# EAGLE board PCB_Layout (EAGLE 9.7.0)
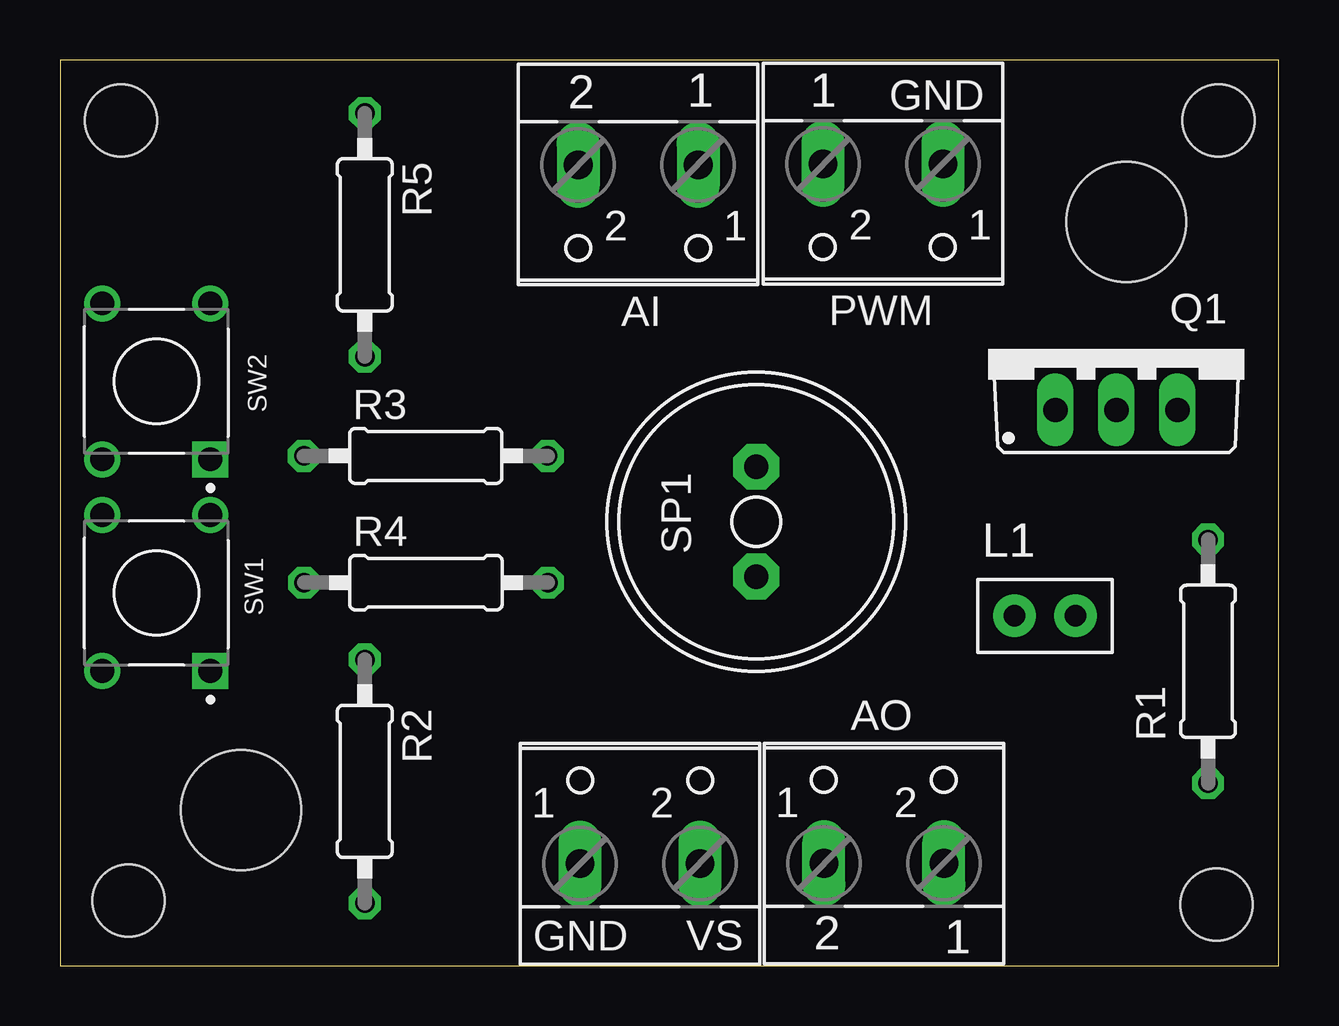
[diagram p0: board, top side]
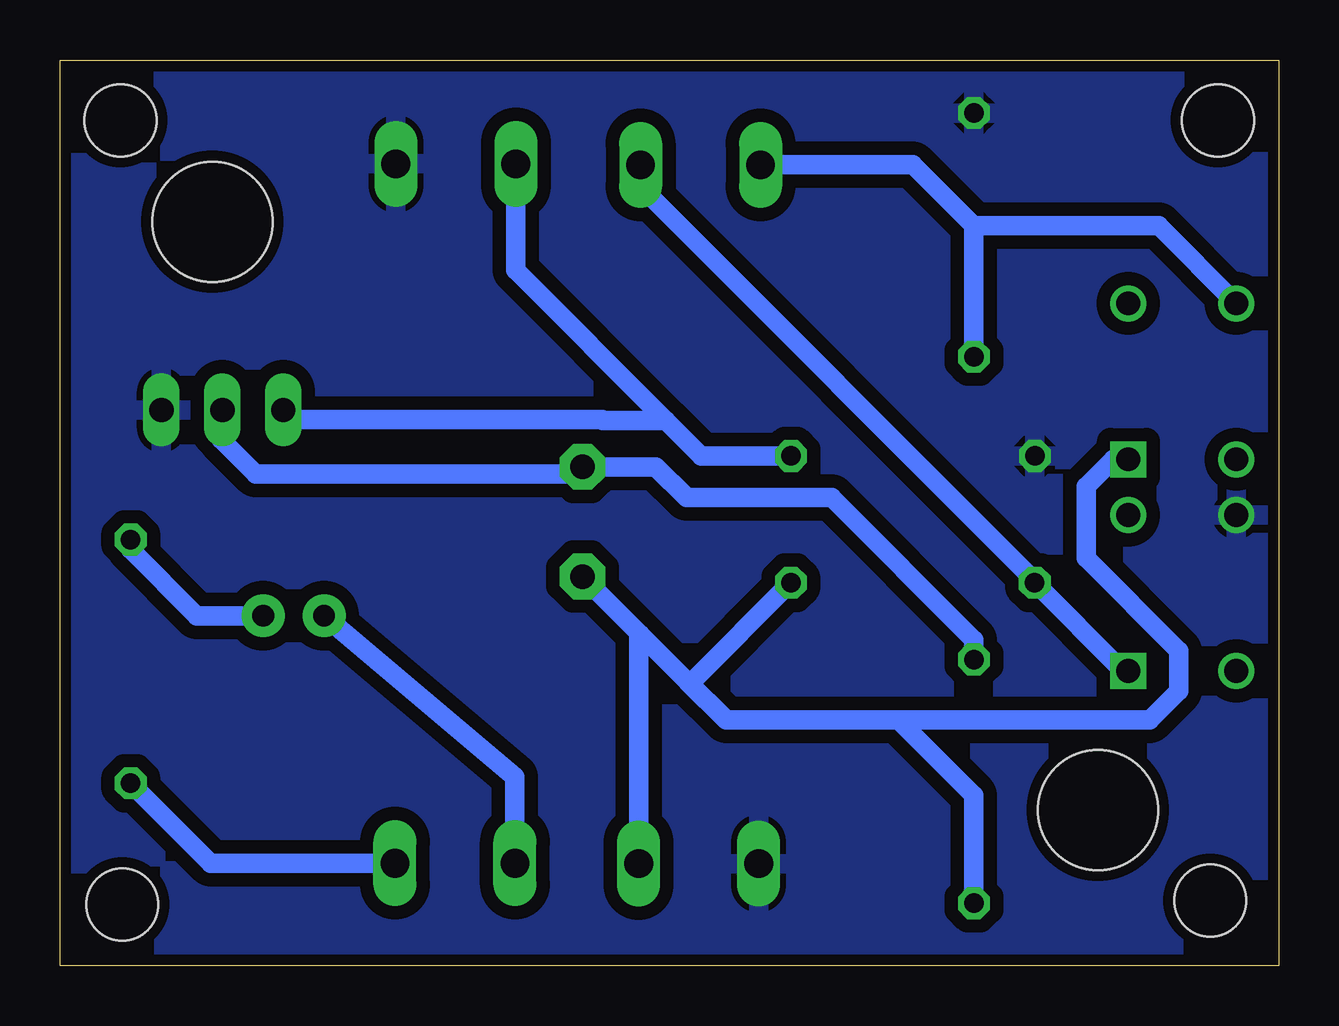
[diagram p1: board, bottom side, seen from below]

Size 50.78 x 37.77 mm. Coordinates in mm from the lower left corner, seen from the top.
Outline: 0,0 50.78,0 50.78,37.77 0,37.77 0,0
Copper layers (1*16): Top 0.035mm / dielectric 1.5mm / Bottom 0.035mm
Design rules "default *": minimum track width 18mil, minimum drill 0.35mm, track to track 22mil, track to pad 24mil, pad to pad 24mil, via to via 22mil, smd to smd 6mil, copper to edge 18mil, drill to drill 6mil, minimum pad ring 10mil, minimum via ring 8mil, stop-mask expansion 4mil, vias tented up to drill 0mil, thermal gap 10mil
Holes 3 mm at 2.85,2.73 2.54,35.25 48.19,2.57 48.26,35.25
Holes 5 mm at 7.54,6.5 44.43,31.02

## Footprints (pad centres in the part's own frame; a part is rotated, then mirrored left to right if it is on the bottom)
W237-102 = drill 1.194 long: 1 -2.5,-1.27; 2 2.5,-1.27
TO220BV = drill 1.016 long: D 0,-2.54; G -2.54,-2.54; S 2.54,-2.54
0207/10 = drill 0.813 octagon: 1 -5.08,0; 2 5.08,0
AL11P = drill 1.016 pad 1.905 octagon: + 2.286,0; - -2.286,0
1825910-6 = drill 0.99 square: 1 3.25,2.25 | drill 0.99: 2 3.25,-2.25; 3 -3.25,2.25; 4 -3.25,-2.25
BI-LED = drill 0.9 pad 1.778: P1 0,0; P2 2.54,0

## Placement (x,y rotation side)
AI  [W237-102]  24.09,32.13 180 top
AO  [W237-102]  34.33,5.55 0 top
PWM  [W237-102]  34.29,32.17 180 top
Q1  IRF520  [TO220BV]  44.02,25.72 0 top
R1  [0207/10]  47.83,12.7 270 top
R2  [0207/10]  12.7,7.7 270 top
R3  [0207/10]  15.24,21.26 0 top
R4  [0207/10]  15.25,15.98 0 top
R5  [0207/10]  12.7,30.48 270 top
SP1  AL11P  [AL11P]  29.01,18.52 90 top
SW1  1825910-6  [1825910-6]  4.01,15.55 270 top
SW2  1825910-6  [1825910-6]  4.01,24.37 270 top
U$1  BI-LED  [BI-LED]  42.31,14.6 180 top
VS  [W237-102]  24.17,5.54 0 top

## Library data of the parts
AI AO PWM VS = con-wago-500_editable; MPN: 237-102; OC_FARNELL: unknown; OC_NEWARK: 70K9898
Q1 = Transistor; CATEGORY: Transistor; DESCRIPTION: MOSFET N-CH 100V 9.7A TO-220AB; DRAIN_CURRENT: 9.7A; MANUFACTURER: Infineon Technologies; MPN: IRF520NPBF; OPERATING_TEMP: -55°C ~ 175°C; PART_STATUS: Active; ROHS_COMPLIANT: Yes; SUB-CATEGORY: MOSFET; THERMALLOSS: 48W; TYPE: N-Channel
R1-R5 = rcl; SPICEPREFIX: R
SP1 = buzzer-editable; OC_FARNELL: unknown; OC_NEWARK: unknown
SW1 SW2 = Switch; CREATED_BY: PCBLayout.com; DIGIKEY_PART_NUMBER: 450-1650-ND; MANUFACTURER: TE Connectivity ALCOSWITCH Switches; MPN: 1825910-6
U$1 = Bi-LED

## Nets
AI1: AI.1 R4.1 SW1.1
AI2: AI.2 R5.2 SW2.4
AO1: AO.2 R1.2
AO2: AO.1 U$1.P2
GND: PWM.1 Q1.S R3.1 R5.1 SW1.4 VS.1
N$2: R1.1 U$1.P1
N$9: Q1.D R2.1 SP1.+
PWM1: PWM.2 Q1.G R3.2
V+: R2.2 R4.2 SP1.- SW2.1 VS.2

## Tracks (layer width: path | path; a pad name or v marks a point on that pad's centre or on a via)
AI1
  Bottom 0.813: AI.1 26.59,32.48 10.17,16.06 R4.1 6.49,12.3 SW1.1
AI2
  Bottom 0.813: AI.2 15.24,33.4 12.7,30.86 | R5.2 12.7,30.86 | SW2.4 5.01,30.86 12.7,30.86
AO1
  Bottom 0.813: AO.2 44.49,4.28 R1.2
AO2
  Bottom 0.813: AO.1 31.83,7.88 U$1.P2
GND
  pour Bottom: 0.47,0.47 49.03,0.47 49.92,1.36 49.92,37.14 0.68,37.14
N$2
  Bottom 0.813: U$1.P1 45.08,14.6 47.83,17.35 R1.1
N$9
  Bottom 0.813: R2.1 12.7,13.6 18.62,19.52 24.67,19.52 25.95,20.81 SP1.+ 29.31,20.51 42.62,20.51 44.06,21.95 44.06,23.14 Q1.D
PWM1
  Bottom 0.813: 25.53,22.74 31.79,29 PWM.2 | 25.53,22.74 24.05,21.26 R3.2 | 25.53,22.74 28.16,22.74 28.19,22.77 41.07,22.77 Q1.G
V+
  Bottom 0.813: SW2.1 6.89,21.12 8.03,19.98 8.03,17 4.17,13.14 4.17,11.46 5.38,10.25 15.85,10.25 | 15.85,10.25 23.03,10.25 24.62,11.84 | R2.2 12.7,7.11 15.85,10.25 | SP1.- 26.59,13.82 | 26.59,13.82 24.62,11.84 | R4.2 24.47,11.84 24.62,11.84 | VS.2 26.67,13.74 26.59,13.82

## Text on the board
tPlace: GND | 2 | 1 | 1 | L1 | GND | 2 | 1